# Altium PCB classyTKL_MX.PcbDoc (part 2 of 2)
Units mm, origin at the board's own origin, x right, y up, seen from the top; angles counter-clockwise.
Board outline 346.59 x 122.85 mm, 2 copper layers (Component Side, Bottom Layer), stack 1.571 mm thick; 205 components, 130 nets, 864 pads, 54 vias.
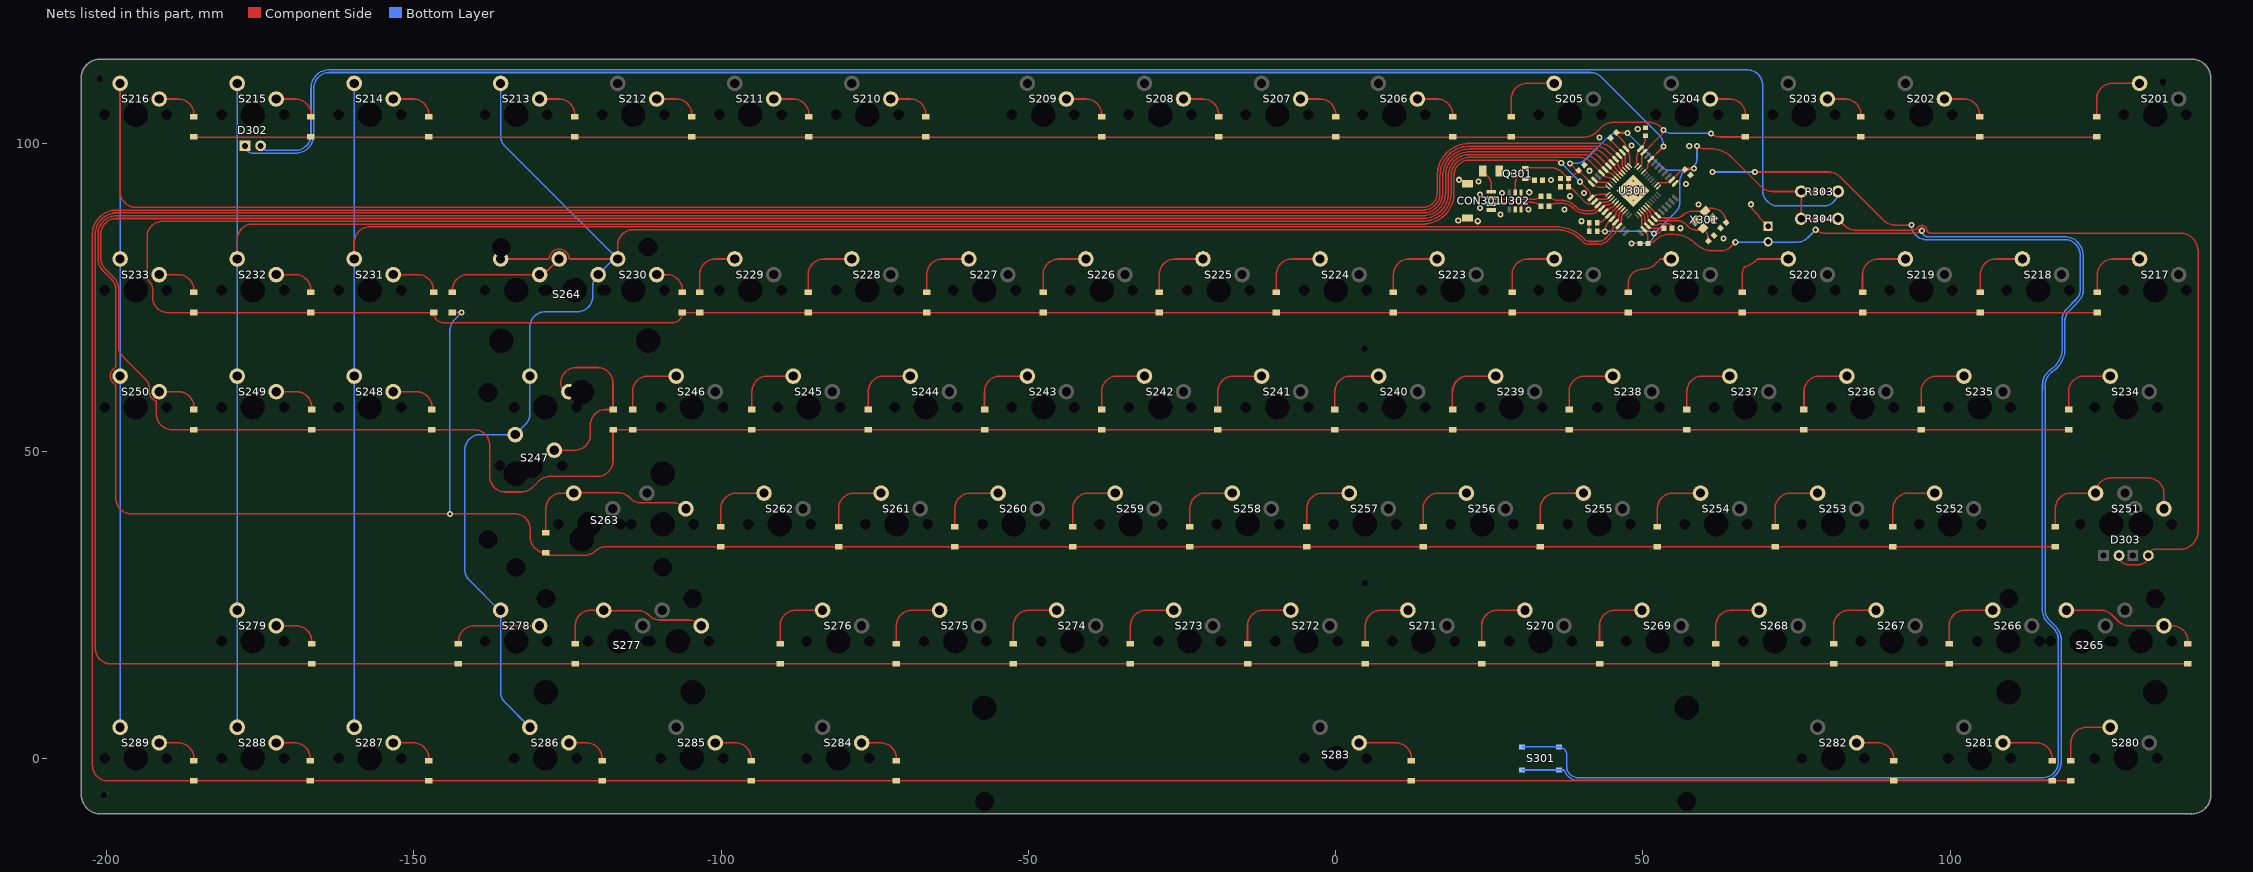
[diagram p2: the nets of this part, all layers, seen from the top]

## Via types
v1: diameter 1, hole 0.5, Component Side to Bottom Layer, tented both sides, 45 vias
v2: diameter 0.6, hole 0.3, Component Side to Bottom Layer, tented bottom, 9 vias

## Nets (pads, with @x,y where several pads share a name; then routed paths per layer and width w, separated by ;. In a path a pad name is that pad's centre, name@x,y a point inside that pad or via, vN(x,y) a via of type N, cw(c..) or ccw(c..) an arc to the next point about the centre after c; other vN are vias at no path point) (continued)
col14: S213.2 S230.2 S247.2 S264.2 S278.2 S286.2 U301.9 | length 338.8
  Component Side w0.254: -127.903,81.71 cw(c-126.366,81.28) -124.784,81.499 ; -124.783,81.498 ccw(c-124.532,81.534) -124.532,81.28 ; U301.9@47.12,88.98 46.808,88.667 ccw(c47.535,87.94) 46.506,87.94 46.506,87.675 cw(c45.101,87.675) U301.9@46.095,86.682 45.829,86.416 cw(c44.53,86.416) 45.449,85.497 44.136,84.184 cw(c42.909,85.41) 42.909,83.676 41.228,83.676 cw(c41.228,85.094) 40.226,84.091 39.937,84.38 ccw(c35.893,80.337) 35.893,86.055 -114.301,86.055 ccw(c-114.301,83.515) -116.841,83.515 S230.2@-116.841,81.28 -124.532,81.28 ; -128.657,81.28 S264.2@-135.891,81.28 -128.656,81.28 ; -128.656,81.28 -128.199,81.28 ccw(c-128.199,81.534) -127.947,81.499 cw(c-126.366,81.28) -127.904,81.709 cw(c-126.366,81.28) -124.784,81.499 ; -124.784,81.499 ccw(c-124.532,81.534) -124.532,81.28
  Bottom Layer w0.254: S213.2@-135.891,109.855 -135.891,101.382 ccw(c-133.351,101.382) -135.147,99.586 S230.2@-116.841,81.28 -117.476,81.28 S264.2@-120.016,78.74 -120.155,78.601 ccw(c-118.359,76.805) -120.899,76.805 -120.899,75.158 cw(c-123.357,75.158) -123.357,72.7 -128.588,72.7 ccw(c-128.588,70.16) -131.128,70.16 S247.2@-131.128,62.23 -131.128,56.138 cw(c-133.668,56.138) -131.872,54.342 S247.2@-133.509,52.705 -139.187,52.705 ccw(c-139.187,50.165) -141.727,50.165 -141.727,30.82 ccw(c-139.187,30.82) -140.983,29.024 -135.891,23.932 -135.891,10.895 ccw(c-133.351,10.895) -135.147,9.099 S286.2@-131.127,5.08
col15: S214.2 S231.2 S248.2 S287.2 U301.8 | length 319.1
  Component Side w0.254: S231.2@-159.702,81.28 -159.702,83.969 cw(c-157.162,83.969) -157.162,86.509 35.893,86.509 cw(c35.893,80.337) 40.258,84.701 40.547,84.412 ccw(c41.228,85.094) 41.228,84.13 42.721,84.13 ccw(c42.721,85.864) 43.947,84.638 44.479,85.17 ccw(c42.725,86.924) 44.582,85.279 ccw(c42.725,86.924) 45.206,86.924 U301.8@45.529,87.247 45.714,87.432 ccw(c44.896,88.25) 46.052,88.25 46.052,88.321 cw(c46.772,88.321) 46.263,88.83 U301.8@46.767,89.333
  Bottom Layer w0.254: S287.2@-159.703,5.08 S248.2@-159.702,62.23 S231.2@-159.702,81.28 S214.2@-159.702,109.855
col16: S215.2 S232.2 S249.2 S279.2 S288.2 U301.1 | length 342.6
  Component Side w0.254: S232.2@-178.753,81.28 -178.753,84.423 cw(c-176.213,84.423) -176.213,86.963 14.198,86.963 ccw(c14.198,92.004) 19.239,92.004 19.239,94.828 cw(c21.779,94.828) 21.779,97.368 35.576,97.368 cw(c35.576,95.774) v1(36.703,96.901) ; v1(39.751,93.853) 40.984,92.62 cw(c39.572,91.207) U301.1@41.569,91.207 cw(c43.02,89.756) 43.02,91.808 U301.1@44.292,91.808
  Bottom Layer w0.254: S288.2@-178.753,5.08 S279.2@-178.753,24.13 S249.2@-178.753,62.23 S232.2@-178.753,81.28 S215.2@-178.753,109.855 ; v1(36.703,96.901) v1(39.751,93.853)
col17: S216.2 S233.2 S250.2 S289.2 U301.36 | length 378.3
  Component Side w0.254: S216.2@-197.803,109.855 -197.803,92.227 ccw(c-195.263,92.227) -195.263,89.687 14.198,89.687 ccw(c14.198,92.004) 16.515,92.004 16.515,94.828 cw(c21.779,94.828) 21.779,100.092 43.052,100.092 cw(c43.052,97.552) 44.848,99.348 U301.36@46.095,98.101 46.36,97.836 cw(c45.747,97.223) 46.614,97.223 46.614,96.576 ccw(c47.259,96.576) 46.803,96.12 U301.36@47.12,95.803
  Bottom Layer w0.254: S289.2@-197.803,5.08 S250.2@-197.803,62.23 S233.2@-197.803,81.28 S216.2@-197.803,109.855
D_N: CON301.2 R305.2 U302.4 | length 9.4
  Component Side w0.254: CON301.2@25.344,91.24 ccw(c25.999,91.895) 25.999,90.969 30.104,90.969 ; U302.4@30.165,92.109 30.165,91.03 cw(c30.104,91.03) 30.105,90.969 ; R305.2@33.392,91.496 cw(c32.118,92.769) 32.352,90.984 cw(c32.118,92.769) 32.118,90.969 30.104,90.969
D_P: CON301.3 R306.2 U302.3 | length 9.5
  Component Side w0.254: CON301.3@25.344,90.24 cw(c25.999,89.585) 25.999,90.511 30.099,90.511 ; U302.3@30.165,89.359 30.165,90.445 ccw(c30.099,90.445) 30.099,90.511 ; R306.2@33.392,89.845 ccw(c31.783,88.236) 32.246,90.464 ccw(c31.783,88.236) 31.783,90.511 30.099,90.511
D_PRE_N: R305.1 U301.3 | length 11.7
  Component Side w0.254: R305.1@34.692,91.496 ccw(c36.326,93.13) 36.326,90.819 36.788,90.819 ; 36.788,90.81 cw(c36.788,87.813) 38.907,89.932 38.994,89.845 ccw(c40.723,91.573) 40.723,89.129 41.685,89.129 ccw(c41.685,89.839) 42.186,89.336 42.542,89.692 ccw(c42.159,90.076) U301.3@42.701,90.076 cw(c43.786,88.991) 43.786,90.525 43.82,90.525 ccw(c43.82,91.979) 44.344,90.623 ccw(c43.82,91.979) 44.387,90.64 ccw(c43.82,91.979) 44.849,90.951 U301.3@44.999,91.101
D_PRE_P: R306.1 U301.4 | length 12
  Component Side w0.254: R306.1@34.692,89.845 cw(c35.918,88.619) 35.918,90.353 36.788,90.353 cw(c36.788,87.813) 38.584,89.609 38.671,89.522 ccw(c40.723,91.573) 40.723,88.672 41.896,88.672 ; 41.661,88.663 41.762,88.663 ccw(c41.762,89.664) 41.896,88.672 ; U301.4@45.212,90.607 45.044,90.439 cw(c44.208,91.275) 44.661,90.183 cw(c44.208,91.275) 44.496,90.128 cw(c44.208,91.275) 44.208,90.093 ccw(c44.208,89.226) 43.595,89.839 U301.4@43.266,89.51 ccw(c43.266,88.925) 42.853,89.339 42.47,88.956 cw(c41.762,89.664) 41.896,88.672
GND: C301.1 C302.1 C303.1 C304.1 C305.1 C306.1 C307.1 C308.1 C309.1 C310.1 CON301.4 CON301.5 CON302.1 R302.2 R307.2 S301.2 U301.5 U301.15 U301.23 U301.35 U301.43 U302.2 X301.2 X301.4 | length 270.7
  Component Side w0.254: C302.1@41.265,85.781 C301.1@41.265,87.178 ; U301.43@42.135,94.142 ccw(c43.003,95.01) 43.003,93.782 43.693,93.782 cw(c43.693,92.579) U301.43@44.544,93.43 ; U301.5@43.832,88.944 44.307,89.419 cw(c44.669,89.057) 44.669,89.569 ccw(c44.669,90.081) 45.031,89.719 U301.5@45.706,90.394 ; U301.43@44.544,93.43 U301.43@44.645,93.328 ; C306.1@44.758,100.942 ccw(c45.657,100.942) 45.021,100.306 U301.35@46.661,98.667 46.847,98.481 cw(c46.253,97.888) 47.092,97.888 47.092,96.538 U301.35@47.474,96.157 ; v2(46.855,92.392) v2(48.411,92.392) U301.43@48.411,90.977 ; v1(48.138,99.751) v1@48.392,99.751 ; U301.15@50.055,89.333 50.505,88.882 cw(c49.781,88.158) 50.805,88.158 ccw(c51.83,88.158) 51.105,87.434 U301.15@51.292,87.247 51.597,86.943 ccw(c51.948,87.295) 51.948,86.797 52.249,86.797 ccw(c52.249,87.27) 52.583,86.935 cw(c52.838,86.681) 52.838,87.041 54.026,87.041 cw(c54.026,86.208) 54.615,86.797 cw(c54.303,86.484) 54.745,86.484 C303.1@54.745,86.289 ; v1(67.581,90.178) ccw(c69.48,90.178) 67.687,89.552 ccw(c67.927,89.635) 67.747,89.455 68.249,88.954 cw(c64.848,85.552) 68.997,87.987 ccw(c69.216,88.116) 69.036,87.936 CON302.1@70.358,86.614 ; v1(68.204,95.433) 80.233,95.433 cw(c80.233,92.893) 82.029,94.689 89.176,87.543 ccw(c90.972,89.339) 90.972,86.799 v1(93.705,86.799)
  Bottom Layer w0.254: S301.2@30.338,1.875 S301.2@36.337,1.875 cw(c36.337,0.62) 37.592,0.62 37.592,-1.27 ccw(c39.441,-1.27) 39.441,-3.119 115.048,-3.119 ccw(c115.048,-0.579) 117.588,-0.579 117.588,19.343 ccw(c115.048,19.343) 116.845,21.139 115.871,22.112 cw(c117.988,24.229) 114.994,24.229 114.994,59.71 cw(c117.988,59.71) 115.015,60.062 115.015,60.933 cw(c117.555,60.933) 115.759,62.729 116.28,63.25 ccw(c114.204,66.675) 117.153,63.964 ccw(c114.204,66.675) 118.206,66.517 cw(c118.46,66.507) 118.209,66.548 118.209,71.361 cw(c120.749,71.361) 118.953,73.157 120.528,74.732 ccw(c118.995,76.265) 121.163,76.265 121.163,81.898 ccw(c118.623,81.898) 118.623,84.438 96.066,84.438 cw(c96.066,86.799) 95.797,84.453 cw(c96.066,86.799) v1(93.705,86.799) ; v1(61.346,95.433) v1(68.204,95.433)
  other v1: 63.124,84.638 56.139,86.289 23.119,87.432 40.01,87.432 19.944,87.559 26.797,88.519 31.374,89.337 37.216,89.337 23.5,89.591 59.055,90.17 38.105,91.496 23.5,91.75 27.056,92.004 40.391,92.004 31.501,92.131 57.023,93.472 23.246,93.909 35.052,94.107 20.071,94.163 41.275,95.631 57.531,99.695 42.931,101.021 49.154,102.418
  other v2: 48.411,90.836 47.633,91.614 49.188,91.614 49.966,92.392 47.633,93.169 49.188,93.169 48.411,93.947
NetC301_2: C301.2 U301.6 | length 4.6
  Component Side w0.254: C301.2@42.565,87.178 ccw(c42.565,88.703) 43.643,87.624 ; 43.644,87.625 U301.6@44.398,88.379 44.398,88.39 46.048,90.04 U301.6@46.06,90.04
NetC307_2: C307.2 U301.17 X301.3 | length 15.5
  Component Side w0.254: U301.17@50.762,90.04 U301.17@52.423,88.379 ccw(c53.461,89.416) 53.461,87.949 54.369,87.949 54.378,87.94 55.377,87.94 ccw(c55.377,89.473) 56.462,88.389 ; 56.462,88.389 cw(c58.008,86.843) 58.008,89.029 60.041,89.029 ccw(c60.041,89.15) X301.3@60.126,89.065 cw(c60.596,89.065) 60.596,89.535 61.209,89.535 cw(c61.209,87.208) C307.2@63.536,87.208
NetC308_2: C308.2 U301.16 X301.1 | length 13.4
  Component Side w0.254: U301.16@50.408,89.687 51.109,88.986 cw(c50.747,88.623) 51.259,88.623 ccw(c51.772,88.623) 51.409,88.262 U301.16@51.858,87.813 ; U301.16@51.858,87.813 ccw(c52.626,88.581) 52.626,87.495 54.181,87.495 54.19,87.486 55.787,87.486 cw(c55.787,85.98) 56.851,87.046 ; 56.851,87.045 57.293,86.604 ccw(c58.801,88.112) 58.801,85.979 58.981,85.979 ccw(c58.981,87.099) X301.1@59.773,86.307 59.889,86.191 cw(c58.093,84.395) 60.633,84.395 C308.2@60.633,84.178
NetD201_1: D201.1 S201.1 | length 11.3
  Component Side w0.254: D201.1@123.83,104.41 123.83,107.315 cw(c126.37,107.315) 126.37,109.855 S201.1@130.809,109.855
NetD202_1: D202.1 S202.1 | length 7.2
  Component Side w0.254: S202.1@99.059,107.315 102.24,107.315 cw(c102.24,104.775) D202.1@104.78,104.775
NetD203_1: D203.1 S203.1 | length 6.9
  Component Side w0.254: S203.1@80.009,107.315 82.936,107.315 cw(c82.936,104.775) D203.1@85.476,104.775
NetD204_1: D204.1 S204.1 | length 7.2
  Component Side w0.254: S204.1@60.959,107.315 64.14,107.315 cw(c64.14,104.775) D204.1@66.68,104.775
NetD205_1: D205.1 S205.1 | length 11.3
  Component Side w0.254: D205.1@28.58,104.41 28.58,107.315 cw(c31.12,107.315) 31.12,109.855 S205.1@35.559,109.855
NetD206_1: D206.1 S206.1 | length 7.2
  Component Side w0.254: S206.1@13.304,107.315 16.515,107.315 cw(c16.515,104.775) D206.1@19.055,104.775
NetD207_1: D207.1 S207.1 | length 7.2
  Component Side w0.254: S207.1@-5.716,107.315 -2.535,107.315 cw(c-2.535,104.775) D207.1@0.005,104.775
NetD208_1: D208.1 S208.1 | length 7.2
  Component Side w0.254: S208.1@-24.766,107.315 -21.585,107.315 cw(c-21.585,104.775) D208.1@-19.045,104.775
NetD209_1: D209.1 S209.1 | length 7.2
  Component Side w0.254: S209.1@-43.816,107.315 -40.635,107.315 cw(c-40.635,104.775) D209.1@-38.095,104.775
NetD210_1: D210.1 S210.1 | length 7.2
  Component Side w0.254: S210.1@-72.391,107.315 -69.21,107.315 cw(c-69.21,104.775) D210.1@-66.67,104.775
NetD211_1: D211.1 S211.1 | length 7.2
  Component Side w0.254: S211.1@-91.441,107.315 -88.26,107.315 cw(c-88.26,104.775) D211.1@-85.72,104.775
NetD212_1: D212.1 S212.1 | length 7.2
  Component Side w0.254: S212.1@-110.491,107.315 -107.31,107.315 cw(c-107.31,104.775) D212.1@-104.77,104.775
NetD213_1: D213.1 S213.1 | length 7.2
  Component Side w0.254: S213.1@-129.541,107.315 -126.36,107.315 cw(c-126.36,104.775) D213.1@-123.82,104.775
NetD214_1: D214.1 S214.1 | length 7.2
  Component Side w0.254: S214.1@-153.352,107.315 -150.109,107.315 cw(c-150.109,104.775) D214.1@-147.569,104.775
NetD215_1: D215.1 S215.1 | length 7.1
  Component Side w0.254: S215.1@-172.403,107.315 -169.286,107.315 cw(c-169.286,104.775) D215.1@-166.746,104.775
NetD216_1: D216.1 S216.1 | length 7.1
  Component Side w0.254: S216.1@-191.453,107.315 -188.336,107.315 cw(c-188.336,104.775) D216.1@-185.796,104.775
NetD217_1: D217.1 S217.1 | length 11.2
  Component Side w0.254: D217.1@123.957,75.835 123.957,78.74 cw(c126.497,78.74) 126.497,81.28 S217.1@130.809,81.28
NetD218_1: D218.1 S218.1 | length 11.2
  Component Side w0.254: D218.1@104.907,75.835 104.907,78.74 cw(c107.447,78.74) 107.447,81.28 S218.1@111.759,81.28
NetD219_1: D219.1 S219.1 | length 11.3
  Component Side w0.254: D219.1@85.73,75.835 85.73,78.74 cw(c88.27,78.74) 88.27,81.28 S219.1@92.709,81.28
NetD220_1: D220.1 S220.1 | length 11.7
  Component Side w0.254: D220.1@66.172,75.835 66.172,78.74 cw(c68.712,78.74) 66.452,79.898 cw(c66.678,79.781) 66.611,80.027 ccw(c65.528,84.013) 68.553,81.2 cw(c68.739,81.027) 68.712,81.28 S220.1@73.659,81.28
NetD221_1: D221.1 S221.1 | length 10.3
  Component Side w0.254: D221.1@47.63,75.835 47.63,77.327 cw(c49.894,77.327) 49.894,79.59 ccw(c49.894,82.584) 50.307,79.619 50.311,79.619 ccw(c49.894,82.584) 52.01,80.466 ccw(c49.894,82.584) 52.011,80.468 52.759,81.215 cw(c52.939,81.036) 52.868,81.28 S221.1@54.609,81.28
NetD222_1: D222.1 S222.1 | length 11.2
  Component Side w0.254: D222.1@28.707,75.835 28.707,78.74 cw(c31.247,78.74) 31.247,81.28 S222.1@35.559,81.28
NetD223_1: D223.1 S223.1 | length 11.5
  Component Side w0.254: D223.1@9.403,75.835 9.403,78.74 cw(c11.943,78.74) 11.943,81.28 S223.1@16.509,81.28
NetD224_1: D224.1 S224.1 | length 11.5
  Component Side w0.254: D224.1@-9.647,75.835 -9.647,78.74 cw(c-7.107,78.74) -7.107,81.28 S224.1@-2.541,81.28
NetD225_1: D225.1 S225.1 | length 11.5
  Component Side w0.254: D225.1@-28.697,75.835 -28.697,78.74 cw(c-26.157,78.74) -26.157,81.28 S225.1@-21.591,81.28
NetD226_1: D226.1 S226.1 | length 11.3
  Component Side w0.254: D226.1@-47.62,75.835 -47.62,78.74 cw(c-45.08,78.74) -45.08,81.28 S226.1@-40.641,81.28
NetD227_1: D227.1 S227.1 | length 11.2
  Component Side w0.254: D227.1@-66.543,75.835 -66.543,78.74 cw(c-64.003,78.74) -64.003,81.28 S227.1@-59.691,81.28
NetD228_1: D228.1 S228.1 | length 11.5
  Component Side w0.254: D228.1@-85.847,75.835 -85.847,78.74 cw(c-83.307,78.74) -83.307,81.28 S228.1@-78.741,81.28
NetD229_1: D229.1 S229.1 | length 10.1
  Component Side w0.254: D229.1@-103.5,75.835 -103.5,78.74 cw(c-100.96,78.74) -100.96,81.28 S229.1@-97.791,81.28
NetD230_1: D230.1 S230.1 | length 5.6
  Component Side w0.254: S230.1@-110.491,78.74 -108.834,78.74 cw(c-108.834,76.2) D230.1@-106.294,76.2
NetD231_1: D231.1 S231.1 | length 8
  Component Side w0.254: S231.1@-153.352,78.74 -149.347,78.74 cw(c-149.347,76.2) D231.1@-146.807,76.2
NetD232_1: D232.1 S232.1 | length 7.1
  Component Side w0.254: S232.1@-172.403,78.74 -169.286,78.74 cw(c-169.286,76.2) D232.1@-166.746,76.2
NetD233_1: D233.1 S233.1 | length 7.5
  Component Side w0.254: S233.1@-191.453,78.74 -188.336,78.74 cw(c-188.336,76.2) -185.796,76.2 D233.1@-185.796,75.835
NetD234_1: D234.1 S234.1 | length 11.1
  Component Side w0.254: D234.1@119.258,56.785 119.258,59.69 cw(c121.798,59.69) 121.798,62.23 S234.1@126.047,62.23
NetD235_1: D235.1 S235.1 | length 11.3
  Component Side w0.254: D235.1@95.255,56.785 95.255,59.69 cw(c97.795,59.69) 97.795,62.23 S235.1@102.234,62.23
NetD236_1: D236.1 S236.1 | length 11.3
  Component Side w0.254: D236.1@76.205,56.785 76.205,59.69 cw(c78.745,59.69) 78.745,62.23 S236.1@83.184,62.23
NetD237_1: D237.1 S237.1 | length 11.3
  Component Side w0.254: D237.1@57.155,56.785 57.155,59.69 cw(c59.695,59.69) 59.695,62.23 S237.1@64.134,62.23
NetD238_1: D238.1 S238.1 | length 11.5
  Component Side w0.254: D238.1@37.978,56.785 37.978,59.69 cw(c40.518,59.69) 40.518,62.23 S238.1@45.084,62.23
NetD239_1: D239.1 S239.1 | length 19.8
  Component Side w0.254: D239.1@18.992,56.785 18.992,59.69 cw(c21.532,59.69) 21.532,62.23 S239.1@26.034,62.23 21.595,62.23 ccw(c21.595,59.69) 19.055,59.69
NetD240_1: D240.1 S240.1 | length 11.5
  Component Side w0.254: D240.1@-0.122,56.785 -0.122,59.69 cw(c2.418,59.69) 2.418,62.23 S240.1@6.984,62.23
NetD241_1: D241.1 S241.1 | length 11.5
  Component Side w0.254: D241.1@-19.172,56.785 -19.172,59.69 cw(c-16.632,59.69) -16.632,62.23 S241.1@-12.066,62.23
NetD242_1: D242.1 S242.1 | length 11.3
  Component Side w0.254: D242.1@-38.095,56.785 -38.095,59.69 cw(c-35.555,59.69) -35.555,62.23 S242.1@-31.116,62.23
NetD243_1: D243.1 S243.1 | length 11.3
  Component Side w0.254: D243.1@-57.145,56.785 -57.145,59.69 cw(c-54.605,59.69) -54.605,62.23 S243.1@-50.166,62.23
NetD244_1: D244.1 S244.1 | length 11.2
  Component Side w0.254: D244.1@-76.068,56.785 -76.068,59.69 cw(c-73.528,59.69) -73.528,62.23 S244.1@-69.216,62.23
NetD245_1: D245.1 S245.1 | length 11.1
  Component Side w0.254: D245.1@-94.991,56.785 -94.991,59.69 cw(c-92.451,59.69) -92.451,62.23 S245.1@-88.266,62.23
NetD246_1: D246.1 S246.1 | length 11.5
  Component Side w0.254: D246.1@-114.422,56.785 -114.422,59.69 cw(c-111.882,59.69) -111.882,62.23 S246.1@-107.316,62.23
NetD247_1: D247.1 S247.1 | length 33
  Component Side w0.254: S247.1@-127.005,50.165 -123.825,50.165 ccw(c-123.825,52.705) -121.285,52.705 -121.285,54.245 cw(c-118.745,54.245) -118.745,56.785 D247.1@-117.597,56.785 -117.597,61.087 ccw(c-120.137,61.087) -120.137,63.627 -123.571,63.627 ccw(c-123.571,61.087) -126.111,61.087 -126.111,61.023 ccw(c-124.778,61.023) S247.1@-124.778,59.69
  Bottom Layer w0.254: S247.1@-127.159,50.165 S247.1@-126.468,50.856 ; S247.1@-124.981,59.487 S247.1@-124.778,59.69
NetD248_1: D248.1 S248.1 | length 7.7
  Component Side w0.254: S248.1@-153.352,59.69 -149.601,59.69 cw(c-149.601,57.15) D248.1@-147.061,57.15
NetD249_1: D249.1 S249.1 | length 7.2
  Component Side w0.254: S249.1@-172.403,59.69 -169.159,59.69 cw(c-169.159,57.15) D249.1@-166.619,57.15
NetD250_1: D250.1 S250.1 | length 7.1
  Component Side w0.254: S250.1@-191.453,59.69 -188.336,59.69 cw(c-188.336,57.15) D250.1@-185.796,57.15
NetD251_1: D251.1 S251.1 | length 27.4
  Component Side w0.254: D251.1@117.099,37.735 117.099,40.64 ; 117.099,40.952 117.099,40.64 ; S251.1@123.666,43.18 119.639,43.18 ccw(c119.639,40.64) 117.099,40.64 ; S251.1@123.686,43.492 cw(c126.135,43.18) 126.135,45.649 132.238,45.649 cw(c132.238,43.109) 134.778,43.109 S251.1@134.778,40.64
NetD252_1: D252.1 S252.1 | length 11.1
  Component Side w0.254: D252.1@90.683,37.735 90.683,40.64 cw(c93.223,40.64) 93.223,43.18 S252.1@97.472,43.18
NetD253_1: D253.1 S253.1 | length 11.3
  Component Side w0.254: D253.1@71.506,37.735 71.506,40.64 cw(c74.046,40.64) 74.046,43.18 S253.1@78.422,43.18
NetD254_1: D254.1 S254.1 | length 11.4
  Component Side w0.254: D254.1@52.329,37.735 52.329,40.64 cw(c54.869,40.64) 54.869,43.18 S254.1@59.372,43.18
NetD255_1: D255.1 S255.1 | length 11.4
  Component Side w0.254: D255.1@33.279,37.735 33.279,40.64 cw(c35.819,40.64) 35.819,43.18 S255.1@40.322,43.18
NetD256_1: D256.1 S256.1 | length 20.7
  Component Side w0.254: D256.1@14.229,37.735 14.229,40.64 ; 14.229,40.64 cw(c16.769,40.64) 16.769,43.18 ; 14.229,40.64 cw(c16.769,40.64) 16.769,43.18 ; 16.769,43.18 S256.1@21.272,43.18 16.769,43.18
  Bottom Layer w0.254: S256.1@20.706,42.614 S256.1@21.272,43.18
NetD257_1: D257.1 S257.1 | length 11.3
  Component Side w0.254: D257.1@-4.694,37.735 -4.694,40.64 cw(c-2.154,40.64) -2.154,43.18 S257.1@2.222,43.18
NetD258_1: D258.1 S258.1 | length 11.3
  Component Side w0.254: D258.1@-23.744,37.735 -23.744,40.64 cw(c-21.204,40.64) -21.204,43.18 S258.1@-16.828,43.18
NetD259_1: D259.1 S259.1 | length 11.3
  Component Side w0.254: D259.1@-42.794,37.735 -42.794,40.64 cw(c-40.254,40.64) -40.254,43.18 S259.1@-35.878,43.18
NetD260_1: D260.1 S260.1 | length 11.4
  Component Side w0.254: D260.1@-61.971,37.735 -61.971,40.64 cw(c-59.431,40.64) -59.431,43.18 S260.1@-54.928,43.18
NetD261_1: D261.1 S261.1 | length 11.3
  Component Side w0.254: D261.1@-80.894,37.735 -80.894,40.64 cw(c-78.354,40.64) -78.354,43.18 S261.1@-73.978,43.18
NetD262_1: D262.1 S262.1 | length 11.4
  Component Side w0.254: D262.1@-100.071,37.735 -100.071,40.64 cw(c-97.531,40.64) -97.531,43.18 S262.1@-93.028,43.18
NetD263_1: D263.1 S263.1 | length 32.9
  Component Side w0.254: D263.1@-128.519,36.743 -128.519,40.64 ; S263.1@-105.734,40.64 -105.933,40.839 ccw(c-107.729,39.043) -107.729,41.583 -112.986,41.583 cw(c-112.986,44.123) -114.782,42.327 -114.948,42.492 ccw(c-116.744,40.696) -116.744,43.236 -123.935,43.236 S263.1@-123.991,43.18 -125.979,43.18 ; -128.519,40.64 cw(c-125.979,40.64) -125.979,43.18 ; -128.519,40.64 cw(c-125.979,40.64) -125.979,43.18
NetD264_1: D264.1 S264.1 | length 20.8
  Component Side w0.254: D264.1@-143.759,76.2 cw(c-141.219,76.2) -141.219,78.74 S264.1@-129.541,78.74 ccw(c-129.541,80.273) -128.456,79.189 S264.1@-126.366,81.28
  Bottom Layer w0.254: S264.1@-129.541,78.74 S264.1@-128.85,79.431
NetD265_1: D265.1 S265.1 | length 22.1
  Component Side w0.254: S265.1@118.903,24.13 124.485,24.13 cw(c124.485,21.59) 126.281,23.386 127.334,22.334 ccw(c129.13,24.13) 129.13,21.59 S265.1@134.778,21.59 136.149,21.59 cw(c136.149,19.05) D265.1@138.689,19.05
NetD266_1: D266.1 S266.1 | length 11.5
  Component Side w0.254: D266.1@99.827,18.685 99.827,21.59 cw(c102.367,21.59) 102.367,24.13 S266.1@106.939,24.13
NetD267_1: D267.1 S267.1 | length 11.3
  Component Side w0.254: D267.1@81.031,18.685 81.031,21.59 cw(c83.571,21.59) 83.571,24.13 S267.1@87.947,24.13
NetD268_1: D268.1 S268.1 | length 11.4
  Component Side w0.254: D268.1@61.854,18.685 61.854,21.59 cw(c64.394,21.59) 64.394,24.13 S268.1@68.897,24.13
NetD269_1: D269.1 S269.1 | length 11.3
  Component Side w0.254: D269.1@42.931,18.685 42.931,21.59 cw(c45.471,21.59) 45.471,24.13 S269.1@49.847,24.13
NetD270_1: D270.1 S270.1 | length 11.4
  Component Side w0.254: D270.1@23.754,18.685 23.754,21.59 cw(c26.294,21.59) 26.294,24.13 S270.1@30.797,24.13
NetD271_1: D271.1 S271.1 | length 11.3
  Component Side w0.254: D271.1@4.831,18.685 4.831,21.59 cw(c7.371,21.59) 7.371,24.13 S271.1@11.747,24.13
NetD272_1: D272.1 S272.1 | length 11.4
  Component Side w0.254: D272.1@-14.346,18.685 -14.346,21.59 cw(c-11.806,21.59) -11.806,24.13 S272.1@-7.303,24.13
NetD273_1: D273.1 S273.1 | length 11.4
  Component Side w0.254: D273.1@-33.396,18.685 -33.396,21.59 cw(c-30.856,21.59) -30.856,24.13 S273.1@-26.353,24.13
NetD274_1: D274.1 S274.1 | length 11.4
  Component Side w0.254: D274.1@-52.446,18.685 -52.446,21.59 cw(c-49.906,21.59) -49.906,24.13 S274.1@-45.402,24.13
NetD275_1: D275.1 S275.1 | length 11.4
  Component Side w0.254: D275.1@-71.496,18.685 -71.496,21.59 cw(c-68.956,21.59) -68.956,24.13 S275.1@-64.453,24.13
NetD276_1: D276.1 S276.1 | length 11.3
  Component Side w0.254: D276.1@-90.419,18.685 -90.419,21.59 cw(c-87.879,21.59) -87.879,24.13 S276.1@-83.503,24.13
NetD277_1: D277.1 S277.1 | length 25.6
  Component Side w0.254: D277.1@-123.75,18.685 -123.75,21.59 cw(c-121.21,21.59) -121.21,24.13 S277.1@-119.121,24.13 -119.05,24.059 -113.569,24.059 cw(c-113.569,21.519) -111.773,23.315 -111.734,23.277 ccw(c-109.938,25.073) -109.938,22.533 -105.241,22.533 cw(c-105.241,19.993) -103.445,21.789 S277.1@-103.246,21.59
NetD278_1: D278.1 S278.1 | length 14.7
  Component Side w0.254: D278.1@-142.743,19.05 cw(c-140.203,19.05) -140.203,21.59 S278.1@-129.541,21.59
NetD279_1: D279.1 S279.1 | length 7.2
  Component Side w0.254: S279.1@-172.403,21.59 -169.159,21.59 cw(c-169.159,19.05) D279.1@-166.619,19.05
NetD280_1: D280.1 S280.1 | length 10.8
  Component Side w0.254: D280.1@119.639,-0.365 119.639,2.54 cw(c122.179,2.54) 122.179,5.08 S280.1@126.047,5.08
NetD281_1: D281.1 S281.1 | length 9.5
  Component Side w0.254: S281.1@108.585,2.54 114.051,2.54 cw(c114.051,0) D281.1@116.591,0
NetD282_1: D282.1 S282.1 | length 7.5
  Component Side w0.254: S282.1@84.772,2.54 88.27,2.54 cw(c88.27,0) D282.1@90.81,0
NetD283_1: D283.1 S283.1 | length 10
  Component Side w0.254: S283.1@3.81,2.54 9.784,2.54 cw(c9.784,0) D283.1@12.324,0
NetD284_1: D284.1 S284.1 | length 7.1
  Component Side w0.254: S284.1@-77.153,2.54 -74.036,2.54 cw(c-74.036,0) D284.1@-71.496,0
NetD285_1: D285.1 S285.1 | length 7.3
  Component Side w0.254: S285.1@-100.965,2.54 -97.658,2.54 cw(c-97.658,0) D285.1@-95.118,0
NetD286_1: D286.1 S286.1 | length 6.9
  Component Side w0.254: S286.1@-124.777,2.54 -121.915,2.54 cw(c-121.915,0) D286.1@-119.375,0
NetD287_1: D287.1 S287.1 | length 7.2
  Component Side w0.254: S287.1@-153.353,2.54 -150.109,2.54 cw(c-150.109,0) D287.1@-147.569,0
NetD288_1: D288.1 S288.1 | length 7
  Component Side w0.254: S288.1@-172.403,2.54 -169.413,2.54 cw(c-169.413,0) D288.1@-166.873,0
NetD289_1: D289.1 S289.1 | length 7.1
  Component Side w0.254: S289.1@-191.453,2.54 -188.336,2.54 cw(c-188.336,0) D289.1@-185.796,0
NetD302_1: D302.1 R303.2 | length 291.2
  Component Side w0.254: R303.2@79.395,92.258 R303.2@81.745,92.258
  Bottom Layer w0.254: D302.1@-174.942,99.695 -174.195,98.947 -169.286,98.947 ccw(c-169.286,101.487) -166.746,101.487 -166.746,109.082 cw(c-163.752,109.082) -163.752,112.076 66.934,112.076 cw(c66.934,109.536) 69.474,109.536 69.474,105.581 ; 69.48,105.411 69.48,95.862 ccw(c69.734,95.862) 69.482,95.831 cw(c69.032,95.776) 69.485,95.776 69.485,95.09 cw(c69.032,95.09) 69.482,95.035 ccw(c69.734,95.004) 69.48,95.004 69.48,92.456 ccw(c72.02,92.456) 72.02,89.916 79.403,89.916 ccw(c79.403,92.258) R303.2@81.745,92.258
NetD303_1: D303.1 R304.2 | length 126.5
  Component Side w0.254: R304.2@79.395,87.813 R304.2@81.745,87.813 82.858,86.701 ccw(c84.654,88.497) 84.654,85.957 93.705,85.957 ccw(c93.705,87.356) 94.694,86.367 cw(c95.382,85.908) 96.176,86.14 cw(c95.382,85.908) 96.177,86.138 cw(c95.382,85.908) 96.207,85.972 ccw(c96.46,85.991) 96.225,85.895 ccw(c96.813,86.14) 96.813,85.503 137.346,85.503 cw(c137.346,82.509) 140.34,82.509 140.34,37.013 cw(c137.346,37.013) 137.346,34.019 133.237,34.019 ccw(c133.237,33.02) D303.1@132.238,33.02 cw(c130.77,33.02) 132.198,32.681 cw(c130.77,33.02) 131.109,31.592 cw(c130.77,33.02) 130.77,31.552 128.943,31.552 cw(c128.943,33.02) 128.201,31.754 cw(c128.943,33.02) 127.677,32.277 cw(c128.943,33.02) D303.1@127.475,33.02
NetF301_2: F301.2 Q301.3 | length 1.9
  Component Side w0.254: F301.2@26.623,95.631 27.347,95.631 cw(c27.347,94.088) Q301.3@28.439,95.179
NetQ301_1: Q301.1 R307.1 | length 1.6
  Component Side w0.254: Q301.1@30.839,94.229 32.075,94.229 cw(c32.075,93.812) R307.1@32.37,94.107
NetR302_1: R302.1 U301.33 | length 5.2
  Component Side w0.254: U301.33@48.994,96.51 48.994,97.782 cw(c51.046,97.782) U301.33@49.595,99.233 49.675,99.313 ccw(c47.879,101.109) 50.419,101.109 R302.1@50.419,101.331
PC7: D201.2 D202.2 D203.2 D204.2 D205.2 D206.2 D207.2 D208.2 D209.2 D210.2 D211.2 D212.2 D213.2 D214.2 D215.2 D216.2 U301.32 | length 322.5
  Component Side w0.254: D216.2@-185.796,101.125 40.586,101.125 ccw(c40.586,103.665) 42.382,101.869 43.275,102.761 cw(c45.071,100.965) 45.071,103.505 51.079,103.505 cw(c51.079,100.965) 52.875,102.761 v1(53.345,102.291) cw(c52.285,102.291) 53.035,101.541 U301.32@50.161,98.667 ; U301.32@49.348,96.157 49.626,96.435 ccw(c49.231,96.83) 49.789,96.83 49.789,97.956 cw(c50.563,97.956) 49.828,98.195 cw(c50.563,97.956) U301.32@50.016,98.502 ; v1(61.087,101.727) ccw(c62.504,103.144) 62.504,101.14 D204.2@66.68,101.14 ; 62.743,101.125 D201.2@123.83,101.125
  Bottom Layer w0.254: v1(53.345,102.291) ccw(c54.707,103.653) 54.707,101.727 v1(61.087,101.727)
PF0: D217.2 D218.2 D219.2 D220.2 D221.2 D222.2 D223.2 D224.2 D225.2 D226.2 D227.2 D228.2 D229.2 D230.2 D231.2 D232.2 D233.2 U301.41 | length 578.6
  Component Side w0.254: U301.41@45.208,94.18 ccw(c44.328,93.3) 44.328,94.544 cw(c44.328,95.348) 43.76,94.78 U301.41@43.266,95.273 41.461,97.078 ccw(c39.665,95.282) 39.665,97.822 21.779,97.822 ccw(c21.779,94.828) 18.785,94.828 18.785,92.004 cw(c14.198,92.004) 14.198,87.417 -190.876,87.417 ccw(c-190.876,84.877) -193.416,84.877 -193.416,78.625 ccw(c-191.681,78.625) -192.908,77.399 -192.886,77.377 cw(c-193.753,76.51) -192.527,76.51 -192.527,75.09 ccw(c-189.987,75.09) -189.987,72.55 -185.796,72.55 -166.746,72.55 -146.807,72.55 ccw(c-145.179,72.55) -145.179,70.922 -107.922,70.922 ccw(c-107.922,72.55) -106.294,72.55 -103.5,72.55 -85.847,72.55 -66.543,72.55 -47.62,72.55 -28.697,72.55 -9.647,72.55 9.403,72.55 28.707,72.55 47.63,72.55 66.172,72.55 85.73,72.55 104.907,72.55 D217.2@123.957,72.55 ; U301.41@45.208,94.18 U301.41@45.352,94.036
PF1: D234.2 D235.2 D236.2 D237.2 D238.2 D239.2 D240.2 D241.2 D242.2 D243.2 D244.2 D245.2 D246.2 D247.2 D248.2 D249.2 D250.2 U301.40 | length 617.2
  Component Side w0.254: 45.089,95.006 ccw(c44.365,94.282) 44.365,95.306 U301.40@43.832,95.839 42.139,97.532 ccw(c40.343,95.736) 40.343,98.276 21.779,98.276 ccw(c21.779,94.828) 18.331,94.828 18.331,92.004 cw(c14.198,92.004) 14.198,87.871 -198.404,87.871 ccw(c-198.404,85.331) -200.944,85.331 -200.944,81.414 ccw(c-198.404,81.414) -200.2,79.618 -198.919,78.338 cw(c-201.036,76.22) -198.918,78.336 cw(c-201.036,76.22) -198.042,76.22 -198.042,67.141 ccw(c-195.502,67.141) -197.298,65.345 -193.789,61.836 cw(c-195.585,60.04) -193.045,60.04 -193.045,59.817 ccw(c-191.453,59.69) -192.055,58.211 cw(c-192.151,57.976) -191.897,57.975 -191.897,56.04 ccw(c-189.357,56.04) -189.357,53.5 -140.203,53.5 cw(c-140.203,50.96) -137.663,50.96 -137.663,45.903 ccw(c-135.123,45.903) -135.123,43.363 -132.492,43.363 ccw(c-132.492,45.903) -130.696,44.107 -129.643,45.159 cw(c-127.847,43.363) -127.847,45.903 -120.137,45.903 ccw(c-120.137,48.443) -117.597,48.443 -117.597,53.5 D234.2@119.258,53.5 ; 45.089,95.006 U301.40@45.706,94.389
PF4: D251.2 D252.2 D253.2 D254.2 D255.2 D256.2 D257.2 D258.2 D259.2 D260.2 D261.2 D262.2 D263.2 D264.2 U301.39 | length 659.3
  Component Side w0.254: D264.2@-143.759,72.55 cw(c-143.703,72.494) -143.703,72.573 v1(-142.235,72.573) ; U301.39@44.398,96.404 U301.39@46.06,94.743 ; U301.39@44.455,96.322 42.791,97.986 ccw(c40.995,96.19) 40.995,98.73 21.779,98.73 ccw(c21.779,94.828) 17.877,94.828 17.877,92.004 cw(c14.198,92.004) 14.198,88.325 -198.404,88.325 ccw(c-198.404,85.331) -201.398,85.331 -201.398,81.414 ccw(c-198.404,81.414) -200.521,79.298 -199.239,78.016 cw(c-201.036,76.22) -198.496,76.22 -198.496,63.822 cw(c-198.75,63.821) -198.62,63.602 ccw(c-197.803,62.23) -198.62,60.858 cw(c-198.75,60.639) -198.496,60.638 -198.496,42.347 ccw(c-195.956,42.347) -195.956,39.807 v1(-144.14,39.807) -133.599,39.807 cw(c-133.599,37.267) -131.059,37.267 -131.059,36.013 ccw(c-128.519,36.013) -131.057,35.941 ccw(c-128.519,36.013) D263.2@-128.519,33.473 ccw(c-128.122,33.473) -128.122,33.076 -122.051,33.076 ccw(c-122.051,35.244) -120.518,33.711 cw(c-118.733,31.927) -118.733,34.45 D251.2@117.099,34.45
  Bottom Layer w0.254: v1(-144.14,39.807) -144.14,69.616 cw(c-141.6,69.616) -143.396,71.412 v1(-142.235,72.573)
PF5: D265.2 D266.2 D267.2 D268.2 D269.2 D270.2 D271.2 D272.2 D273.2 D274.2 D275.2 D276.2 D277.2 D278.2 D279.2 U301.38 | length 668.6
  Component Side w0.254: U301.38@44.963,96.957 44.957,96.964 43.48,98.44 ccw(c41.684,96.644) 41.684,99.184 21.779,99.184 ccw(c21.779,94.828) 17.423,94.828 17.423,92.004 cw(c14.198,92.004) 14.198,88.779 -198.404,88.779 ccw(c-198.404,85.331) -201.852,85.331 -201.852,17.94 ccw(c-199.312,17.94) -199.312,15.4 -166.619,15.4 -142.743,15.4 -124.709,15.4 -90.419,15.4 -71.496,15.4 -52.446,15.4 -33.396,15.4 -14.346,15.4 4.831,15.4 23.754,15.4 42.931,15.4 61.854,15.4 81.031,15.4 99.827,15.4 D265.2@138.689,15.4 ; U301.38@44.963,96.97 45.358,96.576 ccw(c46.382,96.576) 45.658,95.852 U301.38@46.413,95.096
PF6: D280.2 D281.2 D282.2 D283.2 D284.2 D285.2 D286.2 D287.2 D288.2 D289.2 U301.37 | length 670.3
  Component Side w0.254: D284.2@-71.496,-3.65 -199.766,-3.65 cw(c-199.766,-1.11) -202.306,-1.11 -202.306,85.331 cw(c-198.404,85.331) -198.404,89.233 14.198,89.233 ccw(c14.198,92.004) 16.969,92.004 16.969,94.828 cw(c21.779,94.828) 21.779,99.638 42.375,99.638 cw(c42.375,97.098) 44.171,98.894 U301.37@45.529,97.536 45.854,97.211 ccw(c47.902,97.211) 46.16,96.133 ccw(c47.902,97.211) 46.453,95.763 U301.37@46.767,95.45 ; D284.2@-71.496,-3.635 D283.2@12.324,-3.635 cw(c10.555,-3.635) 12.324,-3.65 D280.2@119.639,-3.65
RAW: CON301.1 F301.1 | length 3.9
  Component Side w0.254: F301.1@23.923,95.631 24.6,94.954 cw(c22.804,93.158) 25.344,93.158 CON301.1@25.344,92.24
RST: CON302.2 R301.2 S301.1 U301.13 | length 256.5
  Component Side w0.254: U301.13@49.348,88.626 49.527,88.447 cw(c48.893,87.813) 49.789,87.813 49.789,87.012 ccw(c51.057,87.012) U301.13@50.161,86.116 ; U301.13@50.161,86.116 cw(c48.581,84.536) 50.815,84.536 R301.2@50.815,83.82 ccw(c50.815,85.502) 52.004,84.313 52.097,84.406 cw(c54.214,82.288) 53.965,85.272 cw(c54.001,84.819) 54,85.273 cw(c54.001,84.819) 54.003,85.273 55.036,85.273 cw(c55.036,80.463) 58.436,83.866 cw(c55.036,80.463) 58.437,83.864 ; 58.438,83.864 ccw(c61.472,86.899) 61.472,82.607 62.581,82.607 ccw(c62.581,85.147) 64.377,83.351 v1(65.029,84.003) ; v1(78.11,86.035) ccw(c79.395,87.319) 79.395,85.503 94.405,85.503 ccw(c94.405,86.886) 95.382,85.908 95.377,85.902 v1(95.377,85.88)
  Bottom Layer w0.254: S301.1@30.338,-1.875 S301.1@36.337,-1.875 37.031,-1.875 cw(c37.033,-2.129) 37.272,-2.044 ccw(c39.441,-1.27) 39.441,-3.573 115.048,-3.573 ccw(c115.048,-0.579) 118.042,-0.579 118.042,19.343 ccw(c115.048,19.343) 117.166,21.46 116.192,22.433 cw(c117.988,24.229) 115.448,24.229 115.448,59.71 cw(c117.988,59.71) 115.466,60.008 115.466,60.01 ccw(c115.015,60.062) 115.469,60.063 115.469,60.933 cw(c117.555,60.933) 115.79,62.044 cw(c117.555,60.933) 116.081,62.408 116.543,62.871 cw(c116.722,62.691) 116.587,62.906 ccw(c114.204,66.675) 116.813,63.058 ccw(c114.204,66.675) 118.649,66.312 118.663,66.481 ccw(c118.409,66.503) 118.663,66.503 118.663,71.176 cw(c120.906,71.176) 119.32,72.762 120.147,73.589 120.977,74.548 ccw(c118.995,76.265) 121.195,74.838 ccw(c120.176,75.857) 121.617,75.857 121.617,81.898 ccw(c118.623,81.898) 118.623,84.892 96.398,84.892 cw(c96.398,85.908) 95.382,85.908 95.377,85.902 v1(95.377,85.88) ; v1(65.029,84.003) 75.026,84.003 ccw(c75.026,86.543) 76.822,84.747 v1(78.11,86.035)
scroll_led: D302.2 U301.30 | length 252.9
  Component Side w0.254: U301.30@50.055,95.45 50.63,96.025 ; 50.63,96.025 ccw(c50.206,96.449) 50.805,96.449 cw(c52.254,96.449) 51.23,97.473 U301.30@51.292,97.536 v1@53.144,99.388
  Bottom Layer w0.254: D302.2@-177.482,99.695 ccw(c-176.281,99.695) -176.281,98.493 -169.286,98.493 ccw(c-169.286,101.487) -166.292,101.487 -166.292,109.082 cw(c-163.752,109.082) -163.752,111.622 41.438,111.622 cw(c41.438,109.082) 43.234,110.878 52.601,101.512 cw(c50.805,99.716) 53.345,99.716 v1(53.345,99.568)
VCC: C302.2 C303.2 C304.2 C305.2 C306.2 C309.2 C310.2 Q301.2 R301.1 R303.1 R304.1 U301.2 U301.7 U301.14 U301.24 U301.34 U301.44 U302.5 | length 142.8
  Component Side w0.254: U302.5@29.215,92.109 29.215,93.454 cw(c31.755,93.454) 29.959,95.25 Q301.2@30.839,96.129 35.041,96.129 cw(c35.041,93.589) 35.629,96.06 cw(c35.041,93.589) 35.827,96.004 cw(c35.041,93.589) 36.837,95.385 C304.2@37.861,94.361 ; C310.2@37.866,93.02 37.861,93.025 C304.2@37.861,94.361 ; v1(38.105,96.83) 39.263,95.672 C309.2@39.502,95.672 ; C310.2@38.12,93.02 40.669,90.472 ; 40.661,90.479 ccw(c41.159,90.978) 40.669,90.472 ; U301.2@42.135,90.641 42.043,90.549 cw(c41.262,91.33) 41.262,90.226 cw(c41.262,91.066) 40.669,90.472 ; U301.2@42.136,90.642 cw(c42.972,89.805) 42.972,90.988 43.82,90.988 ccw(c43.82,91.853) 44.432,91.241 U301.2@44.645,91.455 ; C302.2@42.565,85.781 v1(43.82,85.781) cw(c45.967,85.781) 44.448,87.298 ; U301.44@44.292,92.975 43.02,92.975 cw(c43.02,95.027) U301.44@41.569,93.576 41.569,93.605 C309.2@39.502,95.672 ; 44.449,87.299 U301.7@44.963,87.813 45.419,88.268 ccw(c44.985,88.702) 45.598,88.702 cw(c46.01,88.702) 45.719,88.993 U301.7@46.413,89.687 ; C306.2@45.677,101.862 47.314,101.862 cw(c47.314,101.593) v1(47.503,101.783) ; 45.867,101.402 46.653,100.616 cw(c45.27,99.233) U301.34@47.226,99.233 cw(c45.775,97.782) 47.827,97.782 U301.34@47.827,96.51 ; v1(48.133,83.82) R301.1@49.515,83.82 ; U301.14@49.701,88.98 49.984,88.697 cw(c49.227,87.94) 50.297,87.94 50.297,87.717 ccw(c51.762,87.717) U301.14@50.726,86.682 51.119,86.289 C303.2@53.458,86.289 52.875,85.706 cw(c52.135,86.445) 52.525,85.475 cw(c52.135,86.445) 52.135,85.4 v1(51.821,85.4) ; U301.24@52.176,93.328 52.449,93.601 cw(c52.71,93.34) 52.71,93.71 53.644,93.71 ccw(c53.644,95.184) 54.685,94.141 56.073,95.528 cw(c56.817,94.784) C305.2@56.817,95.837 cw(c57.241,95.413) 57.241,96.012 v1(58.293,96.012) ; v1(58.801,99.695) ccw(c59.955,100.849) 59.955,99.217 61.075,99.217 ; 61.075,99.208 cw(c61.075,94.398) 64.475,97.801 cw(c61.075,94.398) 64.477,97.799 69.274,93.002 ccw(c71.07,94.798) 71.07,92.258 R303.1@75.746,92.258 ; R304.1@78.095,87.813 R304.1@75.746,87.813 R303.1@75.746,92.258 ; R303.1@78.095,92.258 R303.1@75.746,92.258 ; C304.2@37.861,94.361 ccw(c37.861,95.159) 38.425,94.595 C309.2@39.502,95.672
  Bottom Layer w0.254: v1(38.105,96.83) 38.958,96.83 ccw(c38.958,99.37) 40.754,97.574 44.22,101.039 cw(c46.016,99.243) 46.016,101.783 v1(47.503,101.783) 52.856,96.431 ccw(c54.652,98.227) 53.851,95.816 ccw(c54.652,98.227) 54.652,95.687 56.774,95.687 ; v1@43.91,85.564 cw(c44.127,85.781) v1(43.82,85.781) 50.902,85.781 cw(c50.902,84.48) v1(51.821,85.4) ; v1(48.133,83.82) 50.241,83.82 ccw(c50.241,85.4) v1(51.821,85.4) ; v1(58.801,99.695) 58.801,97.714 cw(c56.774,97.714) 56.774,95.687 ; v1(51.821,85.4) 55.269,88.847 ccw(c53.472,90.643) 56.012,90.643 56.012,93.909 cw(c58.465,93.909) 56.731,95.643 56.774,95.687
pads on no net: D302. D303. S201. S202. S203. S204. S205. S206. S207. S208. S209. S210. S211. S212. S213. S214. S215. S216. S217. S218. S219. S220. S221. S222. S223. S224. S225. S226. S227. S228. S229. S230. S231. S232. S233. S234. S235. S236. S237. S238. S239. S240. S241. S242. S243. S244. S245. S246. S247. S248. S249. S250. S251. S252. S253. S254. S255. S256. S257. S258. S259. S260. S261. S262. S263. S264. S265. S266. S267. S268. S269. S270. S271. S272. S273. S274. S275. S276. S277. S278. S279. S280. S281. S282. S283. S284. S285. S286. S287. S288. S289. U301.42 U302.1 U302.6
copper on no net: | length 23.4
  Component Side w0.279: 32.136,0.738 cw(c28.418,0.614) 32.135,0.752

## Polygon pours and split planes (outlines as drawn)
GND on Bottom Layer "Bottom Layer-GND" (hatched 45Degree grid 0.508 track 0.203, remove dead copper, pour order 0): 21.087,86.035 22.738,86.035 ccw(c22.738,88.615) 24.563,86.79 24.988,87.215 cw(c26.124,86.079) 26.124,87.686 35.565,87.686 cw(c35.565,84.747) 37.643,86.825 ccw(c37.734,86.915) 37.644,86.824 37.643,86.825 39.022,85.446 ccw(c41.28,87.704) 41.28,84.511 56.012,84.511 cw(c56.012,81.572) 58.09,83.65 ccw(c58.181,83.74) 58.091,83.649 58.09,83.65 58.961,82.779 ccw(c61.219,85.037) 61.219,81.844 65.594,81.844 ccw(c65.594,83.675) 66.889,82.38 ccw(c64.63,84.638) 67.824,84.638 67.824,88.956 ccw(c64.63,88.956) 66.889,91.214 55.731,102.372 cw(c55.641,102.282) 55.731,102.372 ccw(c53.472,100.114) 53.472,103.307 45.344,103.307 ccw(c45.344,100.114) 43.086,102.372 ccw(c43.176,102.282) 43.086,102.372 39.167,98.453 cw(c39.258,98.363) 39.168,98.454 39.167,98.453 cw(c37.089,100.531) 37.089,97.592 21.087,97.592 ccw(c21.087,96.195) 19.69,96.195 19.69,87.432 ccw(c21.087,87.432)
GND on Component Side "Component Side-GND" (hatched 45Degree grid 0.508 track 0.203, remove dead copper, pour order 1): 21.087,86.035 22.738,86.035 ccw(c22.738,88.615) 24.563,86.79 24.988,87.215 cw(c26.124,86.079) 26.124,87.686 35.565,87.686 cw(c35.565,84.747) 37.643,86.825 ccw(c37.734,86.915) 37.644,86.824 37.643,86.825 39.022,85.446 ccw(c41.28,87.704) 41.28,84.511 56.012,84.511 cw(c56.012,81.572) 58.09,83.65 ccw(c58.181,83.74) 58.091,83.649 58.09,83.65 58.961,82.779 ccw(c61.219,85.037) 61.219,81.844 65.594,81.844 ccw(c65.594,83.675) 66.889,82.38 ccw(c64.63,84.638) 67.824,84.638 67.824,88.956 ccw(c64.63,88.956) 66.889,91.214 55.731,102.372 cw(c55.641,102.282) 55.731,102.372 ccw(c53.472,100.114) 53.472,103.307 45.344,103.307 ccw(c45.344,100.114) 43.086,102.372 ccw(c43.176,102.282) 43.086,102.372 39.167,98.453 cw(c39.258,98.363) 39.168,98.454 39.167,98.453 cw(c37.089,100.531) 37.089,97.592 21.087,97.592 ccw(c21.087,96.195) 19.69,96.195 19.69,87.432 ccw(c21.087,87.432)

## Other copper
Component Side:
  region: 1746 vertices and 2 holes, not listed, extent 25.4,-2.516 31.312,3.623
  region: 3595 vertices and 0 holes, not listed, extent -32.103,-3.251 -24.943,3.909
  text "Rev A3" at -4.318,-6.096 h3
Bottom Layer:
  text "Reset" at 36.521,-5.575 h3

## Silkscreen, mask and mechanical layers (free items; w line width, h text height)
Top Overlay:
  lines w0.254: 73.919,90.48 73.919,85.908 89.794,85.908 ; 87.889,85.908 89.794,85.908 ; 89.794,89.083 89.794,85.908 ; 89.794,85.908 89.794,89.972 ; 89.794,89.972 73.919,89.972 73.919,94.544 89.794,94.544 89.794,89.972
  text "+" at -175.339,101.7 h0.75 r270
  text "-" at -177.818,101.071 h0.75
  text "C" at -177.691,97.255 h0.75
  text "A" at -175.151,97.255 h0.75
  text "R_SCROLL" at 83.444,91.75 h0.75
  text "RESET" at 68.834,88.519 h0.75
  text "R_CAPS" at 83.571,87.432 h0.75
  text "+" at 127.079,35.025 h0.75 r270
  text "+" at 131.841,35.025 h0.75 r270
  text "-" at 124.6,34.396 h0.75
  text "-" at 129.362,34.396 h0.75
  text "C" at 124.727,30.58 h0.75
  text "A" at 127.267,30.58 h0.75
  text "C" at 129.489,30.58 h0.75
  text "A" at 132.029,30.58 h0.75
Top Solder:
  drawing of 3 lines, arcs and shapes, not listed
  text "Rev A3" at -4.318,-6.096 h3
  text "Rev A3" at -4.318,-6.096 h3
  text "Rev A3" at -4.318,-6.096 h3
Solder Side:
  text "Reset" at 36.521,-5.575 h3
outline:
  lines w0.203: -52.991,85.4 -52.984,85.393
  lines w0.254: -204.032,-5.896 -204.032,110.685 cw(c-201.032,110.685) -201.032,113.685 ; -204,-5.896 ccw(c-201,-5.896) -201,-8.896 139.299,-8.896 ; -201.032,113.671 139.295,113.671 cw(c139.295,110.671) 142.295,110.671 142.295,-5.915 ; 139.299,-8.915 ccw(c139.299,-5.915) 142.299,-5.915
Mechanical 13:
  lines w0.254: -204.032,-5.896 -204.032,110.685 cw(c-201.032,110.685) -201.032,113.685 ; -204,-5.896 ccw(c-201,-5.896) -201,-8.896 139.299,-8.896 ; -201.032,113.671 139.295,113.671 cw(c139.295,110.671) 142.295,110.671 142.295,-5.915 ; 139.299,-8.915 ccw(c139.299,-5.915) 142.299,-5.915
Mechanical 16:
  lines w0.254: 31.882,97.465 37.089,97.465 ; 37.089,97.465 ccw(c37.089,100.531) 39.258,98.363 41.28,100.386 43.176,102.282 cw(c45.344,100.114) 45.344,103.18 53.472,103.18 cw(c53.472,100.114) 55.641,102.282 66.798,91.124 cw(c64.63,88.956) 67.696,88.956 67.696,84.638 cw(c64.63,84.638) 66.798,82.47 cw(c65.594,83.675) 65.594,81.971 61.219,81.971 cw(c61.219,85.037) 59.051,82.869 58.181,83.74 ccw(c56.012,81.572) 56.012,84.638 41.28,84.638 cw(c41.28,87.704) 39.112,85.536 37.734,86.915 ccw(c35.565,84.747) 35.565,87.813 26.124,87.813 ccw(c26.124,86.079) 24.897,87.305 24.473,86.88 cw(c22.738,88.615) 22.738,86.162 21.087,86.162 cw(c21.087,87.432) 19.817,87.432 19.817,96.195 cw(c21.087,96.195) 21.087,97.465 23.627,97.465 37.089,97.465 ; -137.028,39.807 ccw(c-136.774,39.807) -136.774,39.553 cw(c-136.774,39.426) -136.647,39.426 -136.647,33.33 ccw(c-135.377,33.33) -135.377,32.06 -125.852,32.06 ccw(c-125.852,33.33) -124.582,33.33 -124.582,38.029 ccw(c-125.852,38.029) -125.852,39.299 -129.281,39.299 cw(c-129.281,39.807) -129.789,39.807 -129.789,43.236 ccw(c-131.059,43.236) -131.059,44.506 -134.869,44.506 -135.758,44.506 ccw(c-135.758,43.236) -137.028,43.236 -137.028,39.807

## Dimensions
-204.032,110.685 to 142.295,110.671 on top dimensions
139.295,113.671 to 139.299,-8.896 on top dimensions
139.299,-8.896 to 139.295,113.671 on bot dimensions
142.295,110.671 to -204.032,110.685 on bot dimensions